# Altium PCB JacdacBrainESP32 48.PcbDoc (part 2 of 3)
Units mm, origin at the board's own origin, x right, y up, seen from the top; angles counter-clockwise.
Board outline 34 x 42.68 mm, 2 copper layers (Top Layer, Bottom Layer), stack 1.525 mm thick; 80 components, 57 nets, 295 pads, 72 vias.
Unrouted connection lines stored in the file: 49.
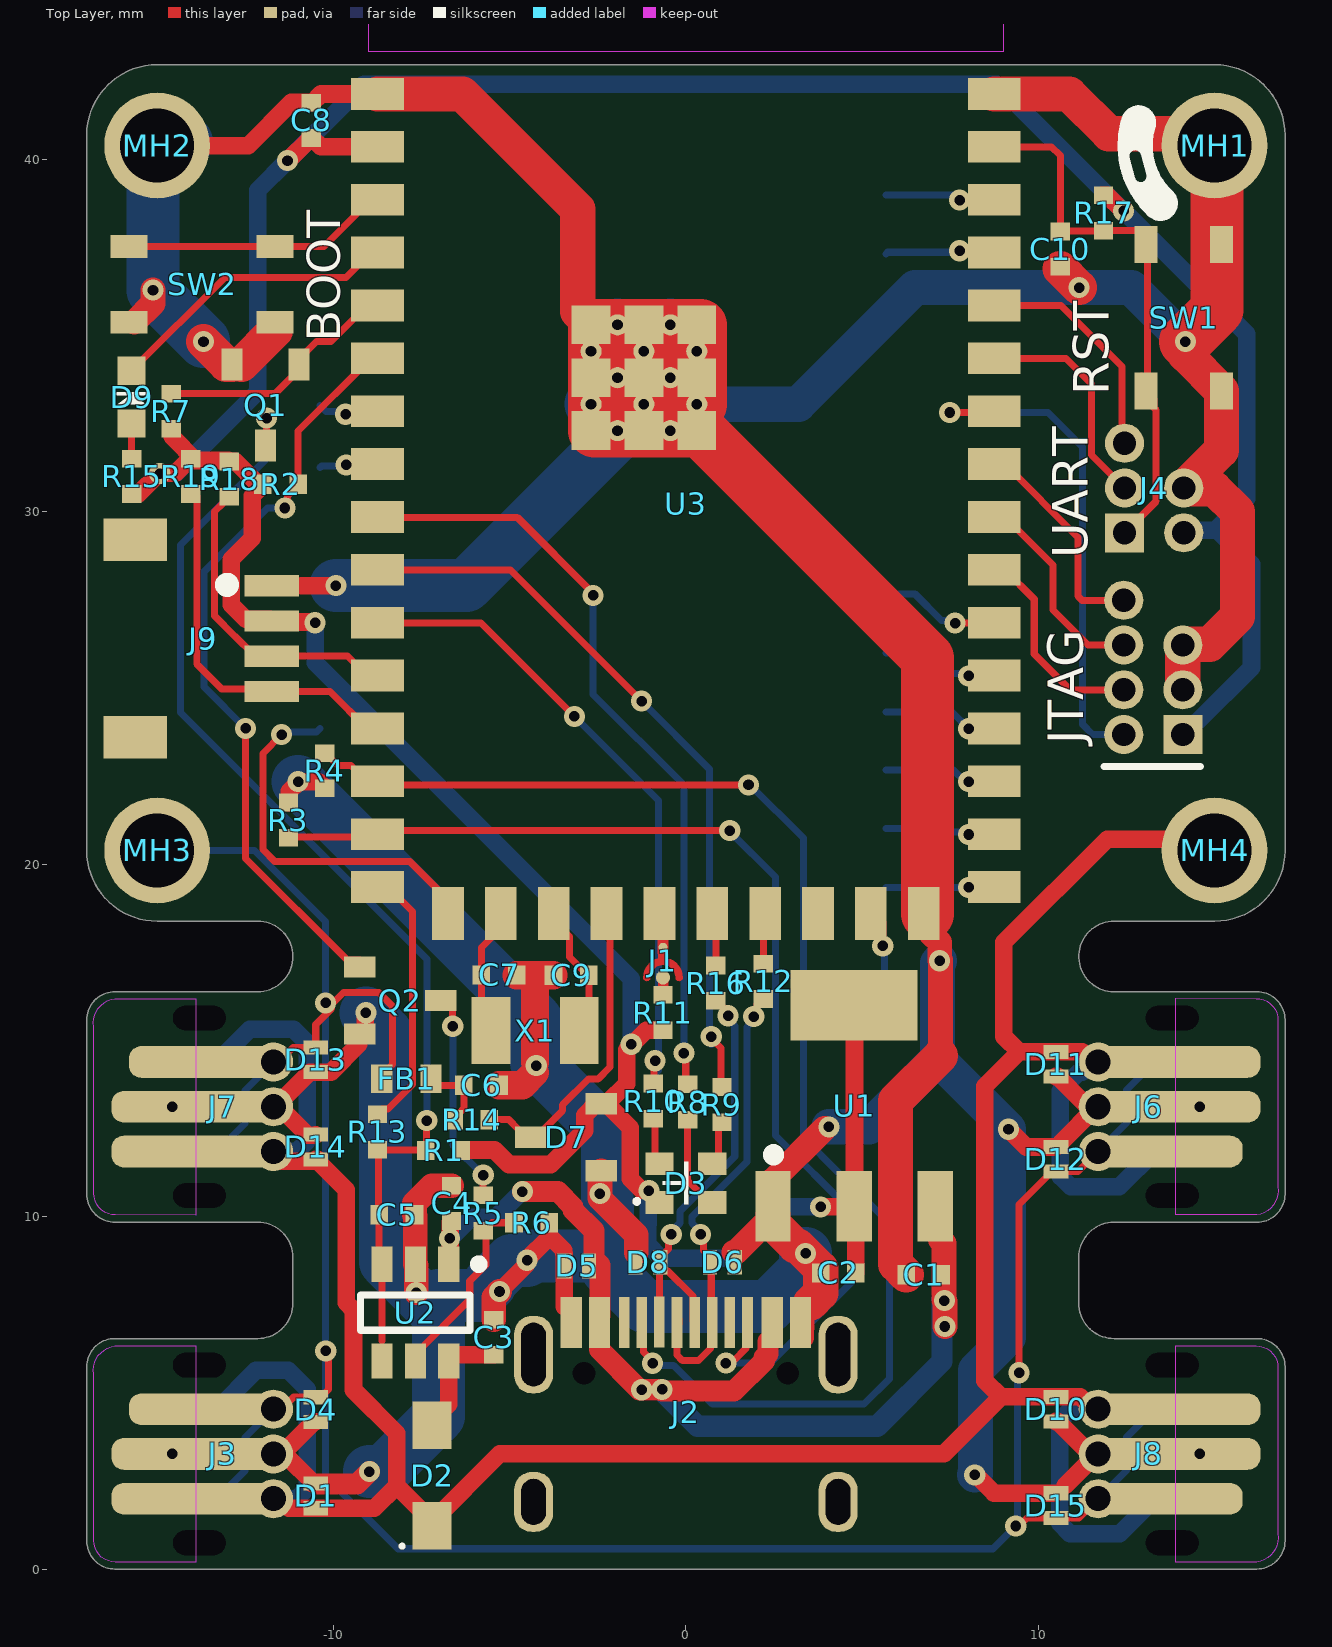
[diagram p0: Top Layer view]

## Part data (continued)
SW1 SW2: "SWITCH TACTILE SPST-NO 0.05A 16V", Color=Blue, Current Rating="50 mA", Manufacturer="ITT /  C&K Components", Operating Force="3.9 N", Operating Temperature Range="- 40 C to + 85 C", Supplier Part Number 1=CKN10504DKR-ND, Voltage Rating DC="16 VDC", Actuator=Oval, Brand="C&K Components", ComponentLink1Description="Online datasheet", ComponentLink1URL=https://datasheet.ciiva.com/18514/pts810-4mar13-18514167.pdf, Contact Form=SPST, Contact Plating=Silver, Factory Pack Quantity=2900, Manufacturer Part Number=PTS810SJG250SMTRLFS, Mounting Direction=Straight, Mounting Style=SMD/SMT, Packaging=Reel, Part # Aliases=Y97LT25B8DBFP, Pricing 1="1=0.3, 10=0.29, 25=0.2792, 50=0.2688, 100=0.2585, 250=0.2378, 500=0.2068, 1000=0.1758 (USD)", Product Category="Tactile Switches", RoHS=Details, Series=PTS810, Stem Height="2.5 mm", Stock 1=76414, Supplier 1=Digikey, Switch Function="OFF - (ON)", Termination Style="J Form Lead", Travel="0.2 mm"
TP1 TP2 TP5 TP6 TP7 TP8 TP9 TP10 TP11 TP12 TP13 TP14: "Test Point"
U1: library part AP2114HA-3.3TRG1, "Fixed 6V 3.3V 390mV @ 1A SOT-223 Linear Voltage Regulators (LDO) RoHS", Manufacturer="BL(Shanghai Belling)", Output Current=1A, Output Voltage=3.3V, Suppliers 1 Part Number=C169246, Category="Voltage Regulators - Linear", ComponentLink1Description="Online datasheet", ComponentLink1URL=https://datasheet.lcsc.com/lcsc/1811151657_BL-Shanghai-Belling-BL9110-330BPFB_C169246.pdf, Manufacturer Part Number=BL9110-330BPFB, Mount="Surface Mount", Number of Regulators=1, Supplier 1=LCSC
U2: "IC PWR SWITCH N-CHAN 1:1 SOT23-6", Case/Package=SOT-23, Manufacturer="Texas Instruments", Max Input Voltage=6.5V, Max Operating Temperature=85°C, Max Power Dissipation=625mW, Min Input Voltage=2.5V, Min Operating Temperature=-40°C, On-State Resistance=85mR, Output Current=1.5A, Package Quantity=1, Supplier Part Number 1=296-32464-1-ND, Category="Hot Swap Controllers", ComponentLink1Description="Online datasheet", ComponentLink1URL=https://datasheet.ciiva.com/15108/getdatasheetpartid-297517-15108509.pdf, Lead Free="Lead Free", Manufacturer Part Number=TPS2553DBVR, Max Supply Voltage=6.5V, Min Supply Voltage=2.5V, Number of Outputs=1, Number of Pins=6, Packaging="Tape and Reel", Pricing 1="1=1.20000, 10=1.07100, 25=1.01640, 100=0.78050, 250=0.68972, 500=0.65340, 1000=0.50820 (USD)", Radiation Hardening=No, REACH SVHC="No SVHC", RoHS=Yes, Stock 1=14713, Supplier 1=Digi-Key, Supplier 2=Farnell, Supplier 3=Mouser, Supplier Part Number 2=3124082, Supplier Part Number 3=595-TPS2553DBVR, Weight=0.00127oz
U3: "Wi-Fi Module 802.11b/g/n ESP32-D0WD-V3 w/ Antenna, ADC, I2C, I2S, SPI, PWM, UART", Manufacturer="Espressif Systems", Supplier Part Number 1=1965-ESP32-S2-WROOMCT-ND, Category="RF Receivers, Transceivers", Checked By=?, ComponentLink1Description="Online datasheet", ComponentLink1URL=https://www.espressif.com/sites/default/files/documentation/esp32-s2-wroom_esp32-s2-wroom-i_datasheet_en.pdf, Created By="D Gakure", Manufacturer Part Number=ESP32-S2-WROOM, Pricing 1="1=2.13000 (USD)", RoHS=No, Stock 1=965, Supplier 1=Digi-Key
X1: "CRYSTAL 32.7680KHZ 12.5PF SMD", Case/Package=SMD/SMT, ESR (Equivalent Series Resistance)=70kR, Frequency=32.768kHz, Frequency Tolerance=20ppm, Load Capacitance=12.5pF, Manufacturer="ECS International", Max Operating Temperature=125°C, Min Operating Temperature=-40°C, Package Quantity=3000, Supplier Part Number 1=520-ECS32.7-12.534ST, Category=Crystals, Checked By=?, ComponentLink1Description="Online datasheet", ComponentLink1URL=https://datasheet.ciiva.com/15047/ecx-34s-15047020.pdf, Created By="D Gakure", Height=0.035inch, Lead Free="Lead Free", Lead Pitch=1.8mm, Length=0.126inch, Manufacturer Part Number=ECS-.327-12.5-34S-TR, Mount="Surface Mount", Number of Pins=2, Packaging="Tape and Reel", Pricing 1="1=1.24000, 10=1.11000, 50=1.04000, 100=0.91300, 1000=0.72000, 10000=0.69500 (USD)", RoHS=Yes, RoHS Compliant=Yes, Series=ECX-34S, Stock 1=10, Supplier 1=Mouser, Termination=SMD/SMT, Tolerance=20ppm, Width=1.5mm

## Via types
v1: diameter 0.6, hole 0.3, Top Layer to Bottom Layer, tented both sides, 72 vias